# Altium PCB PCB1.PcbDoc
Units mil, origin at the board's own origin, x right, y up, seen from the top; angles counter-clockwise.
Board outline 2750 x 2490 mil, 2 copper layers (Top Layer, Bottom Layer); 35 components, 74 nets, 183 pads, 186 vias.
Unrouted connection lines stored in the file: 1.
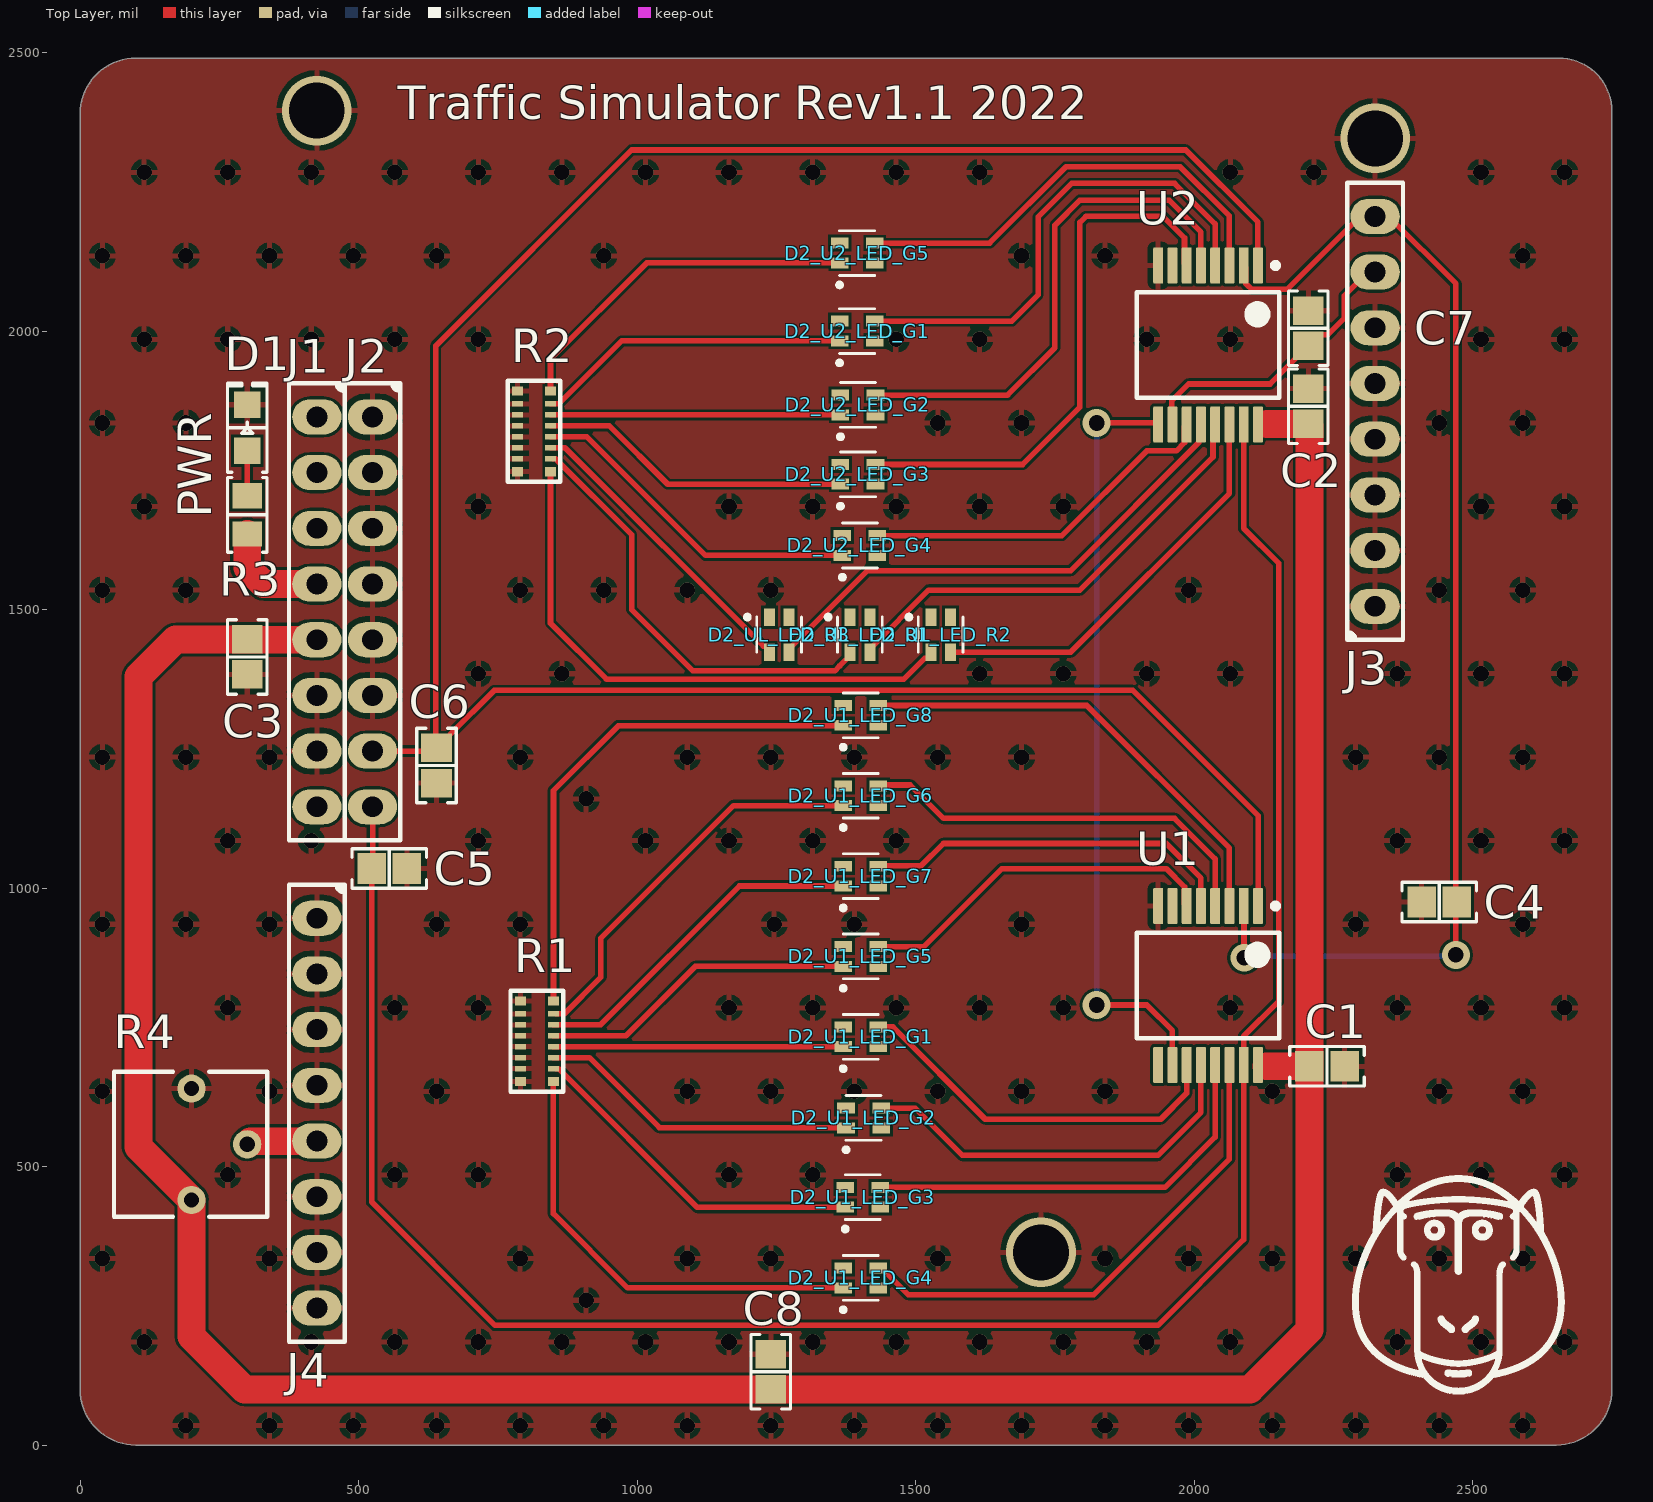
[diagram p0: Top Layer view]
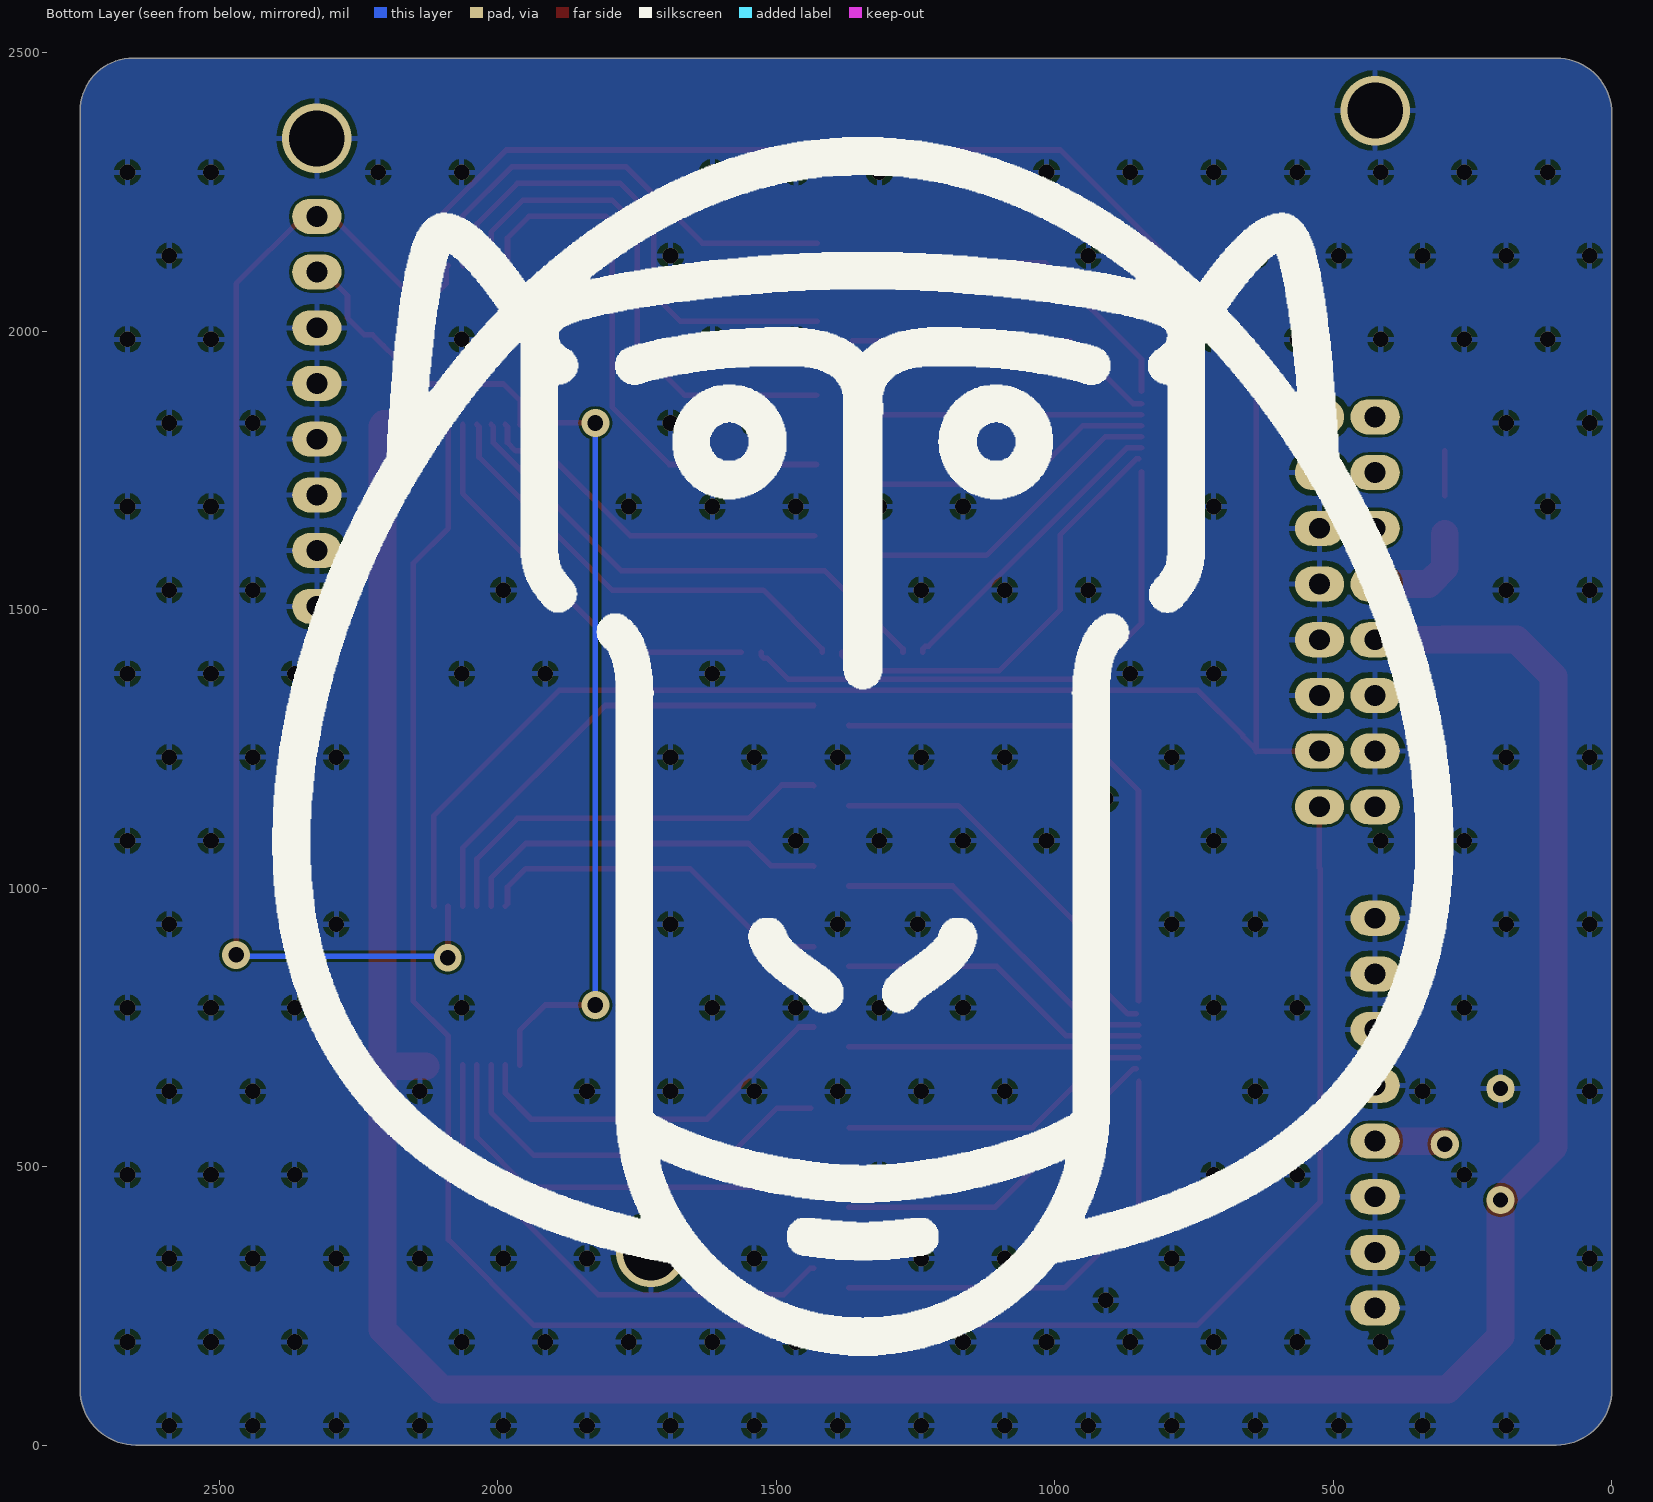
[diagram p1: Bottom Layer view, seen from below]
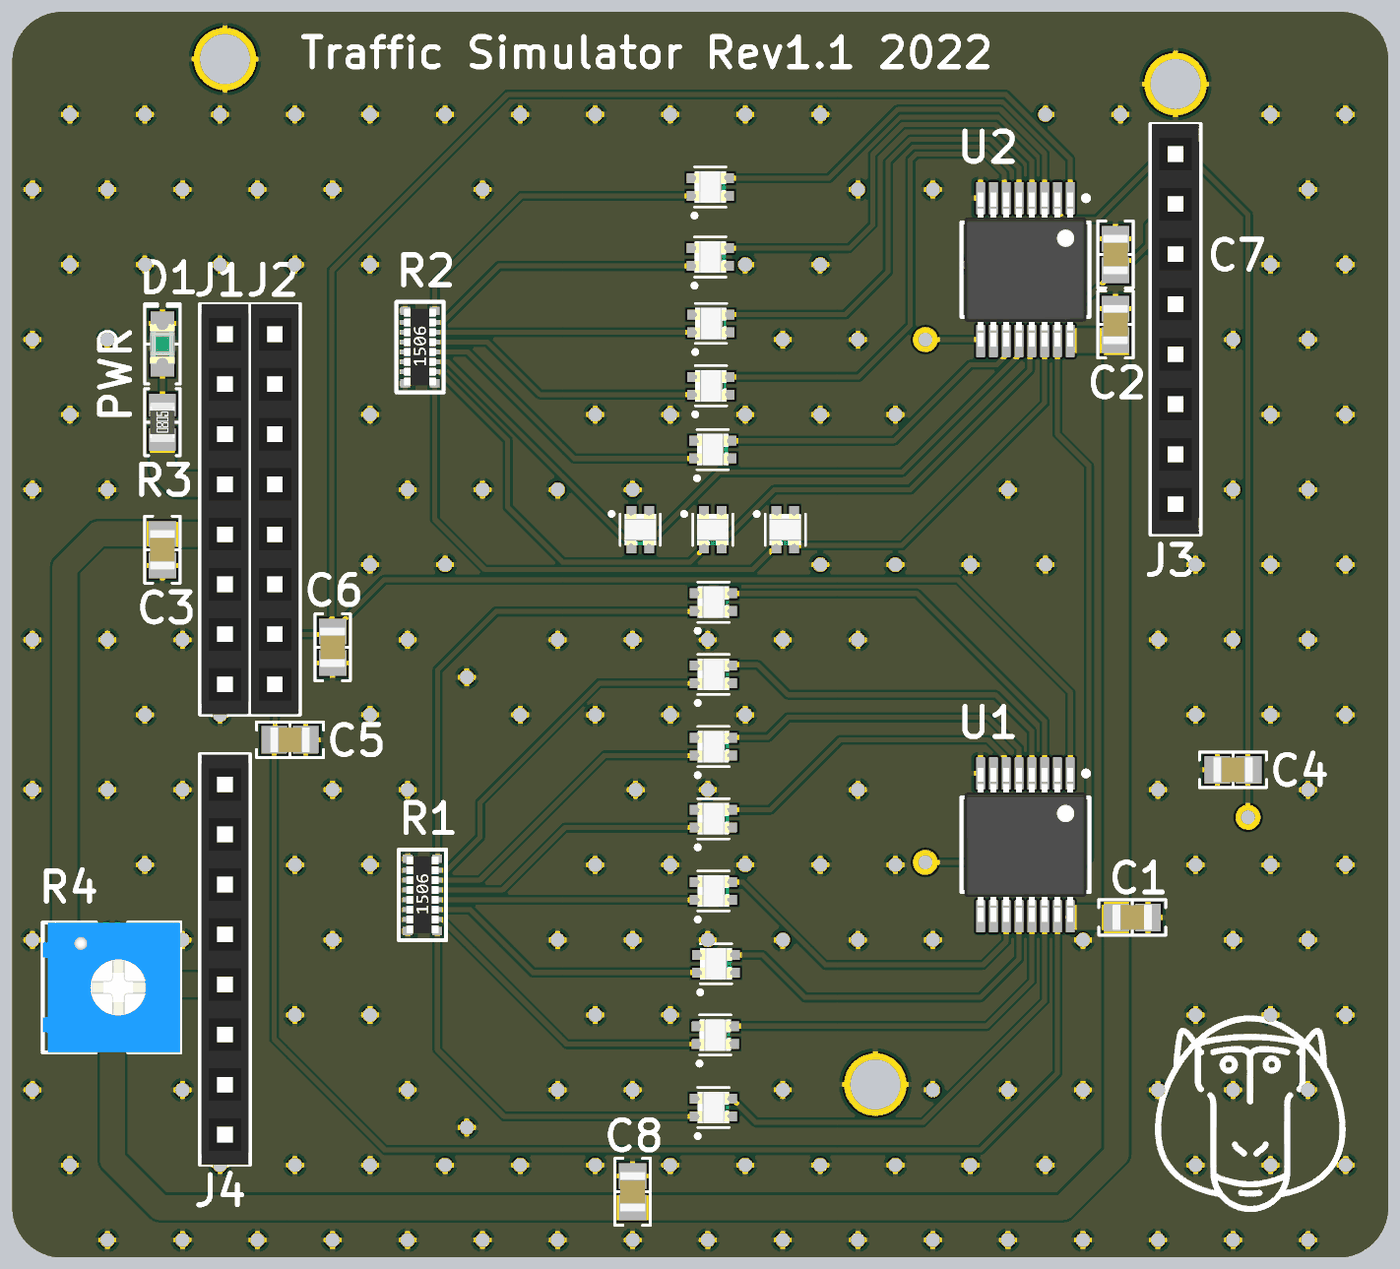
[diagram p2: 3D render of the assembled board from above, using the file's embedded part models]

## Layer stack, top to bottom
Top Solder: solder mask 0.4, Solder Resist, Dk 3.5
Top Layer: signal copper 1.4
Dielectric 1: dielectric 12.6, FR-4, Dk 4.8
Bottom Layer: signal copper 1.4
Bottom Solder: solder mask 0.4, Solder Resist, Dk 3.5

## Board outline
2650,0 ccw(c2650,100) 2750,100 2750,2395 ccw(c2655,2395) 2655,2490 100,2490 ccw(c100,2390) 0,2390 0,100 ccw(c100,100) 100,0

## Design rules (kind name [scope] priority, off if disabled: settings)
Clearance [All] p1: gap=5 ignorepadtopadclearanceinfootprint=FALSE
ComponentClearance [All] p1: gap=10 collisioncheckmode=3 verticalgap=0 showdistances=FALSE
HoleToHoleClearance [All] p1: gap=0 allowstackedmicrovias=TRUE
PolygonConnect [All] p1: connectstyle=Relief reliefconductorwidth=10 reliefentries=4 polygonreliefangle="90 Angle" airgapwidth=10
RoutingVias [All] p1: holewidth=28 width=50 viastyle="Through Hole" minholewidth=28 minwidth=50 maxholewidth=28 maxwidth=50
SilkToSilkClearance [All] p1: silktosilkclearance=0
SilkToSolderMaskClearance [IsPad] p1: minsilkscreentomaskgap=0 clearancetoexposedcopper=TRUE
SolderMaskExpansion [All] p1: expansion=4 istentingtop=FALSE
Width [All] p1: maxlimit=50 minlimit=5 preferedwidth=10 minimp=50.000000 maximp=50.000000 favimp=50.000000
26 further rules are at their usual default settings.

## Classes and differential pairs
net class U2_RED[1..3]: U2_RED1 U2_RED2 U2_RED3
net class U2_LED_R[1..3]: U2_LED_R1 U2_LED_R2 U2_LED_R3
net class U2_LED_G[1..5]: U2_LED_G1 U2_LED_G2 U2_LED_G3 U2_LED_G4 U2_LED_G5
net class U2_GREEN[1..5]: U2_GREEN1 U2_GREEN2 U2_GREEN3 U2_GREEN4 U2_GREEN5
net class U1_LED_G[1..8]: U1_LED_G1 U1_LED_G2 U1_LED_G3 U1_LED_G4 U1_LED_G5 U1_LED_G6 U1_LED_G7 U1_LED_G8
net class U1_GREEN[1..8]: U1_GREEN1 U1_GREEN2 U1_GREEN3 U1_GREEN4 U1_GREEN5 U1_GREEN6 U1_GREEN7 U1_GREEN8
component class UL_LED_R3: D2_UL_LED_R3
component class UL_LED_R2: D2_UL_LED_R2
component class UL_LED_R1: D2_UL_LED_R1
component class U2_LED_G4: D2_U2_LED_G4
component class U2_LED_G2: D2_U2_LED_G2
component class U1_LED_G7: D2_U1_LED_G7
component class U1_LED_G5: D2_U1_LED_G5
component class U1_LED_G3: D2_U1_LED_G3
component class U1_LED_G1: D2_U1_LED_G1
channel class LED: LED7 LED9 LED10 LED11 LED12 LED13 LED14 LED15 LED16 U1_LED_G2 U1_LED_G4 U1_LED_G6 U1_LED_G8 U2_LED_G1 U2_LED_G3 U2_LED_G5
component class U1_LED_G8: D2_U1_LED_G8
component class U1_LED_G6: D2_U1_LED_G6
component class U2_LED_G5: D2_U2_LED_G5
component class U1_LED_G4: D2_U1_LED_G4
component class U2_LED_G3: D2_U2_LED_G3
component class U1_LED_G2: D2_U1_LED_G2
component class U2_LED_G1: D2_U2_LED_G1
component class main: C1 C2 C3 C4 C5 C6 C7 C8 D1 J1 J2 J3 J4 R1 R2 R3 R4 U1 U2 U?

## Components (designator, comment, footprint, x,y, rotation, side; value= is the part's Value field where it differs from the comment)
C1 "1 µF" "CAP 0805_2012" 2238.5,680 r180 top
C2 "1 µF" "CAP 0805_2012" 2205,1865 r270 top
C3 "1 µF" "CAP 0805_2012" 300,1415 r90 top
C4 "1 µF" "CAP 0805_2012" 2440,975 r0 top
C5 "1 µF" "CAP 0805_2012" 555,1035 r180 top
C6 "1 µF" "CAP 0805_2012" 640,1220 r90 top
C7 "1 µF" "CAP 0805_2012" 2205,2005 r270 top
C8 "1 µF" "CAP 0805_2012" 1240,131.5 r270 top
D1 "Green" "LED 0805_2012 GREEN" 300,1826.34 r90 top
D2_U1_LED_G1 "B38G3RGB-10D0003H2U1930" LED_B38G3RGB-10D0003H2U1930 1401.5,732.86 r90 top (schematic designator D2)
D2_U1_LED_G2 "B38G3RGB-10D0003H2U1930" LED_B38G3RGB-10D0003H2U1930 1406.5,587.28 r90 top (schematic designator D2)
D2_U1_LED_G3 "B38G3RGB-10D0003H2U1930" LED_B38G3RGB-10D0003H2U1930 1405,445 r90 top (schematic designator D2)
D2_U1_LED_G4 "B38G3RGB-10D0003H2U1930" LED_B38G3RGB-10D0003H2U1930 1401.5,300 r90 top (schematic designator D2)
D2_U1_LED_G5 "B38G3RGB-10D0003H2U1930" LED_B38G3RGB-10D0003H2U1930 1401.5,877.14 r90 top (schematic designator D2)
D2_U1_LED_G6 "B38G3RGB-10D0003H2U1930" LED_B38G3RGB-10D0003H2U1930 1401.5,1165.71 r90 top (schematic designator D2)
D2_U1_LED_G7 "B38G3RGB-10D0003H2U1930" LED_B38G3RGB-10D0003H2U1930 1401.5,1021.43 r90 top (schematic designator D2)
D2_U1_LED_G8 "B38G3RGB-10D0003H2U1930" LED_B38G3RGB-10D0003H2U1930 1401.5,1310 r90 top (schematic designator D2)
D2_U2_LED_G1 "B38G3RGB-10D0003H2U1930" LED_B38G3RGB-10D0003H2U1930 1395,2000 r90 top (schematic designator D2)
D2_U2_LED_G2 "B38G3RGB-10D0003H2U1930" LED_B38G3RGB-10D0003H2U1930 1396.5,1867.28 r90 top (schematic designator D2)
D2_U2_LED_G3 "B38G3RGB-10D0003H2U1930" LED_B38G3RGB-10D0003H2U1930 1396.5,1742.72 r90 top (schematic designator D2)
D2_U2_LED_G4 "B38G3RGB-10D0003H2U1930" LED_B38G3RGB-10D0003H2U1930 1400,1615 r90 top (schematic designator D2)
D2_U2_LED_G5 "B38G3RGB-10D0003H2U1930" LED_B38G3RGB-10D0003H2U1930 1395,2140 r90 top (schematic designator D2)
D2_UL_LED_R1 "B38G3RGB-10D0003H2U1930" LED_B38G3RGB-10D0003H2U1930 1400,1455 r0 top (schematic designator D2)
D2_UL_LED_R2 "B38G3RGB-10D0003H2U1930" LED_B38G3RGB-10D0003H2U1930 1545,1455 r0 top (schematic designator D2)
D2_UL_LED_R3 "B38G3RGB-10D0003H2U1930" LED_B38G3RGB-10D0003H2U1930 1255,1455 r0 top (schematic designator D2)
J1 "SSW-108-03-T-S" "SAMTEC SSW-108-03-T-S" 425,1495.83 r270 top locked
J2 "SSW-108-03-T-S" "SAMTEC SSW-108-03-T-S" 525,1495.83 r270 top locked
J3 "SSW-108-03-T-S" "SAMTEC SSW-108-03-T-S" 2325,1855.83 r90 top locked
J4 "SSW-108-03-T-S" "SAMTEC SSW-108-03-T-S" 425,595.83 r270 top locked
R1 "EXB-2HV681JV" "RESNET 1506-16 CONVEX" 820,725 r0 top
R2 "EXB-2HV681JV" "RESNET 1506-16 CONVEX" 815,1820 r0 top
R3 "0 Ohms" "RES 0805_2012" 300,1670 r90 top
R4 "10 kOhms" "BOURNS TRIMPOT 3362P-1" 211.81,540 r270 top
U1 "SN74HC165DBR" DB0016A_N 2025,825 r270 top
U2 "3" DB0016A_N 2025,1975 r270 top

## Footprints (in the part's own frame and the unit in brackets; to place one, negate y for a bottom-side part, rotate by r counter-clockwise, add the part's x,y. Pads: shape width x height; smd on the part's side, far side on the other; paste and mask are expansions set on the pad)
"BOURNS TRIMPOT 3362P-1" [mm] "3362 -1/4 ? Square Trimpot® Trimming Potentiometer"
  round 1.29 hole 0.69: 1(-2.54,-0.3) 2(0,2.24) 3(2.54,-0.3)
  silkscreen extent -3.3,-3.84 3.3,3.15, body extent -3.3,-3.84 3.3,3.15, height 4.7
"CAP 0805_2012" [mm] "Chip Capacitor, 2-Leads, Body 2.00x1.20mm, IPC Medium Density"
  rect 1.3x1.4 smd: 1(-0.8,0) 2(0.8,0)
  silkscreen extent -1.7,-0.9 1.7,0.9, body extent -1,-0.64 1,0.64, height 1.26
DB0016A_N [mm] "SOP, 16-Leads, Body 5.6x6.5mm, Pitch 0.65mm, IPC Medium Density"
  rrect22% 1.65x0.45 smd: 1(-3.625,2.275) 2(-3.625,1.625) 3(-3.625,0.975) 4(-3.625,0.325) 5(-3.625,-0.325) 6(-3.625,-0.975) 7(-3.625,-1.625) 8(-3.625,-2.275) 9(3.625,-2.275) 10(3.625,-1.625) 11(3.625,-0.975) 12(3.625,-0.325) 13(3.625,0.325) 14(3.625,0.975) 15(3.625,1.625) 16(3.625,2.275)
  silkscreen extent -3.75,-3.25 2.4,3.25, body extent -3.91,-3.1 3.91,3.1, height 2
"LED 0805_2012 GREEN" [mm] "Chip Diode, 2-Leads, Body 2.00x1.25mm, IPC Medium Density"
  rect 1.2x1.2 smd: 1(-1.05,0) 2(1.05,0)
  silkscreen extent -2.03,-0.9 2.03,0.9, body extent -1,-0.62 1,0.63, height 0.9
LED_B38G3RGB-10D0003H2U1930 [mm]
  rect 0.5x0.8 smd: 1(-0.45,0.8) 2(0.45,0.8) 3(0.45,-0.8) 4(-0.45,-0.8)
  silkscreen extent -1.55,-0.8 1.02,0.9, body extent -0.8,-0.8 0.8,0.8, height 0.4
"RES 0805_2012" [mm] "Chip Resistor, 2-Leads, Body 2.00x1.25mm, IPC Medium Density"
  rect 1.15x1.35 smd: 1(-0.875,0) 2(0.875,0)
  silkscreen extent -1.7,-0.9 1.7,0.9, body extent -1,-0.62 1,0.63, height 0.6
"RESNET 1506-16 CONVEX" [mm] "Array Chip Resistor, 16 leads, 8 resistors, Body 3.8x1.6mm Height 0.55mm"
  rect 0.5x0.425 smd mask+0.032: 1(-0.75,1.837) 8(-0.75,-1.837) 9(0.75,-1.837) 16(0.75,1.837)
  rect 0.5x0.25 smd mask+0.032: 2(-0.75,1.25) 4(-0.75,0.25) 5(-0.75,-0.25) 6(-0.75,-0.75) 7(-0.75,-1.25) 10(0.75,-1.25) 11(0.75,-0.75) 12(0.75,-0.25) 13(0.75,0.25) 15(0.75,1.25)
  rect 0.5x0.25 smd paste+0 mask+0.032: 3(-0.75,0.75) 14(0.75,0.75)
  silkscreen extent -1.2,-2.3 1.2,2.3, body extent -0.83,-1.95 0.82,1.95, height 0.51
"SAMTEC SSW-108-03-T-S" [mm]
  oval 1.6x2.25 hole 0.95: 1(-8.89,0) 2(-6.35,0) 3(-3.81,0) 4(-1.27,0) 5(1.27,0) 6(3.81,0) 7(6.35,0) 8(8.89,0)
  silkscreen extent -10.42,-1.27 10.42,1.27, body extent -10.41,-1.21 10.41,1.21, height 8.51

## Part data
C1 C2 C3 C4 C5 C6 C7 C8: library part 885012207022, "CAP CER 1UF 10V X7R 0805", Device Package="0805 (2012 Metric)", manufacturer="Würth Elektronik", Operating Temperature="-55°C ~ 125°C", Supplier Part Number 1=732-7654-1-ND, Temperature Coefficient=X7R, Tolerance=±10%, Voltage - Rated=10V, Applications="General Purpose", Capacitance="1 µF", componentlink1description=Datasheet, componentlink1url=https://katalog.we-online.de/pbs/datasheet/885012207022.pdf, componentlink2description="DigiKey Link", componentlink2url=https://www.digikey.com/en/products/detail/würth-elektronik/885012207022/5453509, lastupdated="2022-09-19 1:04:10 PM", Lifecycle Status=Active, Minimum Order=1, Mounting Type="Surface Mount, MLCC", Package / Case="0805 (2012 Metric)", packaging=TapeAndReel, Part Number=885012207022, Part Status=Active, partid=9332, price=0.06, series=WCAP-CSGP, Size / Dimension="0.079\" L x 0.049\" W (2.00mm x 1.25mm)", Supplier 1=DigiKey, Thickness (Max)="0.053\" (1.35mm)"
D1: library part XZVG54W-1, "LED GREEN CLEAR CHIP SMD", Current - Test=20mA, Device Package="0805 (2012 Metric)", Lens Color=Colorless, manufacturer=SunLED, Millicandela Rating=49mcd, Supplier Device Package="Chip LED", Supplier Part Number 1=1497-1216-1-ND, Voltage - Forward (Vf) (Typ)=2.1V, Color=Green, componentlink1description=Datasheet, componentlink1url=https://www.sunledusa.com/products/spec/XZVG54W-1.pdf, componentlink2description="DigiKey Link", componentlink2url=https://www.digikey.com/en/products/detail/sunled/XZVG54W-1/4745972, Configuration=Standard, Height (Max)=0.85mm, lastupdated="2022-09-14 8:37:01 AM", Lens Size="1.20mm x 1.25mm", Lens Style="Rectangle with Flat Top", Lens Transparency=Clear, Lifecycle Status=Active, Minimum Order=1, Mounting Type="Surface Mount", Package / Case="0805 (2012 Metric)", packaging=TapeAndReel, Part Number=XZVG54W-1, Part Status=Active, partid=267, price=0.05, series=-, Size / Dimension="2.00mm L x 1.25mm W", Supplier 1=DigiKey, Viewing Angle=120°, Wavelength - Dominant=570nm, Wavelength - Peak=574nm
D2_U1_LED_G1 D2_U1_LED_G2 D2_U1_LED_G3 D2_U1_LED_G4 D2_U1_LED_G5 D2_U1_LED_G6 D2_U1_LED_G7 D2_U1_LED_G8 D2_U2_LED_G1 D2_U2_LED_G2 D2_U2_LED_G3 D2_U2_LED_G4 D2_U2_LED_G5 D2_UL_LED_R1 D2_UL_LED_R2 D2_UL_LED_R3: "Red, Green, Blue (RGB) - LED Indication - Discrete 2V Red, 3V Green, 3V Blue 0606 (1616 Metric)", Package=None, Availability="In Stock", Check_prices=https://www.snapeda.com/parts/B38G3RGB-10D0003H2U1930/Harvatek/view-part/?ref=eda, MF="Harvatek Corporation", MP=B38G3RGB-10D0003H2U1930, price=None, Purchase-URL=https://pricing.snapeda.com/search/part/B38G3RGB-10D0003H2U1930/?ref=eda, SnapEDA_Link=https://www.snapeda.com/parts/B38G3RGB-10D0003H2U1930/Harvatek/view-part/?ref=snap
J1 J2 J3 J4: "CONN RCPT 8POS 0.1 TIN PCB", Current Rating (Amps)="5.7A per Contact", Insulation Color=Black, manufacturer="Samtec Inc.", Material Flammability Rating="UL94 V-0", Operating Temperature="-55°C ~ 105°C", Supplier Part Number 1=SAM8866-ND, componentlink1description=Datasheet, componentlink1url=http://suddendocs.samtec.com/catalog_english/ssw_th.pdf, componentlink2description="DigiKey Link", componentlink2url=https://www.digikey.com/en/products/detail/samtec-inc/SSW-108-03-T-S/1790200, Connector Type=Receptacle, Contact Finish - Mating=Tin, Contact Finish - Post=Tin, Contact Length - Post="0.394\" (10.00mm)", Contact Type=Forked, Fastening Type=Push-Pull, Insulation Height="0.335\" (8.51mm)", lastupdated="2022-06-21 3:09:52 PM", Lifecycle Status=Active, Minimum Order=1, Mounting Type="Through Hole", Number of Positions=8, Number of Positions Loaded=All, Number of Rows=1, packaging=Bulk, Part Number=SSW-108-03-T-S, Part Status=Active, Pitch - Mating="0.100\" (2.54mm)", price=0.73, series=SSW, Style="Board to Board or Cable", Supplier 1=DigiKey, Termination=Solder
R1 R2: "RES ARRAY 8 RES 680 OHM 1506", manufacturer="Panasonic Electronic Components", Number of Resistors=8, Operating Temperature="-55°C ~ 125°C", Package / Case="1506, Convex, Long Side Terminals", Power Per Element=62.5mW, Resistance (Ohms)=680, Supplier Device Package=1506, Supplier Part Number 1=Y1681CT-ND, Temperature Coefficient=±200ppm/°C, Tolerance=±5%, Applications="Automotive AEC-Q200", Circuit Type=Isolated, componentlink1description=Datasheet, componentlink1url=https://industrial.panasonic.com/cdbs/www-data/pdf/AOC0000/AOC0000C14.pdf, componentlink2description="DigiKey Link", componentlink2url=https://www.digikey.com/en/products/detail/panasonic-electronic-components/EXB-2HV681JV/285317, Height - Seated (Max)="0.022\" (0.55mm)", lastupdated="2022-09-14 8:40:22 AM", Lifecycle Status=Active, Minimum Order=1, Mounting Type="Surface Mount", Number of Pins=16, packaging=TapeAndReel, Part Number=EXB-2HV681JV, Part Status=Active, partid=684, price=0.03, series=EXB, Size / Dimension="0.150\" L x 0.063\" W (3.80mm x 1.60mm)", Supplier 1=DigiKey
R3: library part CR0805AJ/-000EAS, "RESA-AS 0805 0R JUMPER 125MW", Device Package="0805 (2012 Metric)", manufacturer="Bourns Inc.", Operating Temperature="-55°C ~ 155°C", Power (Watts)="0.125W, 1/8W", Ratings=AEC-Q200, Supplier Device Package=0805, Supplier Part Number 1=CR0805AJ/-000EASCT-ND, Tolerance=Jumper, componentlink1description=Datasheet, componentlink1url=//media.digikey.com/pdf/Data%20Sheets/Bourns%20PDFs/CRyyyyA-AS_Model_DS.pdf, componentlink2description="DigiKey Link", componentlink2url=https://www.digikey.com/en/products/detail/bourns-inc/CR0805AJ-000EAS/10240129, Composition="Thick Film", Features="Anti-Sulfur, Automotive AEC-Q200, Moisture Resistant", Height - Seated (Max)="0.024\" (0.60mm)", lastupdated="2022-09-14 8:22:37 AM", Lifecycle Status=Active, Minimum Order=1, Number of Terminations=2, Package / Case="0805 (2012 Metric)", packaging=TapeAndReel, Part Number=CR0805AJ/-000EAS, Part Status=Active, partid=49707, price=0.01, Resistance="0 Ohms", series=CR0805A-AS, Size / Dimension="0.079\" L x 0.049\" W (2.00mm x 1.25mm)", Supplier 1=DigiKey
R4: library part 3362P-1-103LF, "TRIMMER 10K OHM 0.5W PC PIN TOP", manufacturer="Bourns Inc.", Power (Watts)="0.5W, 1/2W", Resistive Material=Cermet, Supplier Part Number 1=3362P-103LF-ND, Temperature Coefficient=±100ppm/°C, Tolerance=±10%, Adjustment Type="Top Adjustment", componentlink1description=Datasheet, componentlink1url=https://www.bourns.com/docs/Product-Datasheets/3362.pdf, componentlink2description="DigiKey Link", componentlink2url=https://www.digikey.com/en/products/detail/bourns-inc/3362P-1-103LF/1088412, lastupdated="2022-09-14 8:53:23 AM", Lifecycle Status=Active, Minimum Order=1, Mounting Type="Through Hole", Number of Turns=1, packaging=Tube, Part Number=3362P-1-103LF, Part Status=Active, partid=136, price=0.46, Resistance="10 kOhms", series="Trimpot® 3362 - Sealed", Size / Dimension="Rectangular - 0.275\" x 0.260\" Face (6.99mm x 6.60mm)", Supplier 1=DigiKey, Termination Style="PC Pins"
U1 U2: library part CMP-0780-00071-3, "8-Bit Parallel-Load Shift Registers, DB0016A, LARGE T&R", F @ Nom Voltage(Max)(Mhz)=28, Generic Part Number=SN74HC165, ICC @ Nom Voltage(Max)(mA)=0.08, manufacturer="Texas Instruments", Operating Temperature Range(C)="-40 to 125", Rating=Catalog, tpd @ Nom Voltage(Max)(ns)=38, Voltage(Nom)(V)=6, 3-State Output=No, Bits=8, Code_JEDEC=MO-150, DatasheetVersion=SCLS116G, Input Type=CMOS, Output Drive (IOL/IOH)(Max)(mA)=5.2/-5.2, Output Type=CMOS, PackageReference=DB0016A, PackageVersion=http://www.ti.com/lit/ml/mpds507/mpds507.pdf, Technology Family=HC, VCC(Max)(V)=6, VCC(Min)(V)=2

## Via types
v1: diameter 28, hole 28, Top Layer to Bottom Layer, 179 vias
v2: diameter 50, hole 28, Top Layer to Bottom Layer, 4 vias
v3: diameter 125, hole 100, Top Layer to Bottom Layer, 3 vias

## Nets (pads, with @x,y where several pads share a name; then routed paths per layer and width w, separated by ;. In a path a pad name is that pad's centre, name@x,y a point inside that pad or via, vN(x,y) a via of type N, cw(c..) or ccw(c..) an arc to the next point about the centre after c; other vN are vias at no path point)
5V: C1.2 C2.2 C3.2 C8.2 J1.5 R4.3 U1.16 U2.16 | length 5439.1
  Top Layer w50: J1.5 302.64,1445.83 301.97,1446.5 C3.2 171.5,1446.5 105,1380 105,535 R4.3 200,195 295,100 C8.2 2100,100 2207.01,207.01 C1.2 ; 2130,680 C1.2 ; 2130.71,1832.91 2204.41,1832.91 C2.2 ; C2.2@2205,1830 2206.42,1830 2207.01,1829.41 C1.2
En: C5.2 J2.8 U1.15 U2.15 | length 3946.5
  Top Layer w10: J2.8 525,1036.5 C5.2 523.5,436.5 745,215 1935,215 2088.98,368.98 U1.15 2088.98,733.98 2152.01,797.01 2152.01,1582.99 2088.98,1646.02 U2.15
GND: C1.1 C2.1 C3.1 C4.1 C5.1 C6.1 C7.1 C8.1 D1.2 J1.6 J1.7 J2.1 J2.2 J2.3 J2.4 J2.5 J2.6 J3.1 J3.2 J3.3 J3.4 J3.5 J3.6 J4.1 J4.2 J4.3 J4.4 J4.6 J4.7 J4.8 R1.1 R1.2 R1.3 R1.4 R1.5 R1.6 R1.7 R1.8 R2.1 R2.2 R2.3 R2.4 R2.5 R2.6 R2.7 R2.8 R4.1 U1.8 U2.8
  other v1: 190,35 340,35 490,35 640,35 790,35 940,35 1090,35 1240,35 1390,35 1540,35 1690,35 1840,35 1990,35 2140,35 2290,35 2440,35 2590,35 115,185 415,185 565,185 715,185 865,185 1015,185 1165,185 1315,185 1465,185 1615,185 1765,185 1915,185 2065,185 2365,185 2515,185 2665,185 908.5,260 40,335 340,335 790,335 1090,335 1240,335 1540,335 1840,335 1990,335 2140,335 2290,335 2440,335 2590,335 265,485 565,485 715,485 1165,485 1315,485 2365,485 2515,485 2665,485 40,635 340,635 640,635 1090,635 1240,635 1390,635 1540,635 1690,635 1840,635 2140,635 2440,635 2590,635 265,785 565,785 715,785 1165,785 1315,785 1465,785 1615,785 1765,785 2065,785 2365,785 2515,785 2665,785 40,935 190,935 340,935 640,935 790,935 1246,935 1390,935 1690,935 2290,935 2590,935 265,1085 415,1085 715,1085 1015,1085 1165,1085 1315,1085 1465,1085 2365,1085 2515,1085 2665,1085 908.5,1160 40,1235 190,1235 340,1235 790,1235 1090,1235 1240,1235 1390,1235 1540,1235 1690,1235 2290,1235 2440,1235 2590,1235 715,1385 865,1385 1615,1385 1765,1385 1915,1385 2065,1385 2365,1385 2515,1385 2665,1385 40,1535 190,1535 790,1535 940,1535 1090,1535 1240,1535 1990,1535 2440,1535 2590,1535 115,1685 715,1685 1165,1685 1315,1685 1465,1685 1615,1685 1765,1685 2515,1685 2665,1685 40,1835 190,1835 1540,1835 1690,1835 2440,1835 2590,1835 115,1985 265,1985 415,1985 565,1985 715,1985 1465,1985 1615,1985 1915,1985 2065,1985 2515,1985 2665,1985 40,2135 190,2135 340,2135 490,2135 640,2135 940,2135 1690,2135 1840,2135 2590,2135 115,2285 265,2285 415,2285 565,2285 715,2285 865,2285 1015,2285 1165,2285 1315,2285 1465,2285 1615,2285 2065,2285 2215,2285 2515,2285 2665,2285
  other v3: 1725,345.83 2325,2345.83 425,2395.83
LED_PWR: J1.4 R3.1 | length 197.6
  Top Layer w50: R3.1 300,1575.12 329.29,1545.83 J1.4
NetD1_1: D1.1 R3.2 | length 80.6
  Top Layer w10: R3.2 D1.1
NetD2_U1_LED_G1_2: D2_U1_LED_G1.2
NetD2_U1_LED_G1_4: D2_U1_LED_G1.4
NetD2_U1_LED_G2_2: D2_U1_LED_G2.2
NetD2_U1_LED_G2_4: D2_U1_LED_G2.4
NetD2_U1_LED_G3_2: D2_U1_LED_G3.2
NetD2_U1_LED_G3_4: D2_U1_LED_G3.4
NetD2_U1_LED_G4_2: D2_U1_LED_G4.2
NetD2_U1_LED_G4_4: D2_U1_LED_G4.4
NetD2_U1_LED_G5_2: D2_U1_LED_G5.2
NetD2_U1_LED_G5_4: D2_U1_LED_G5.4
NetD2_U1_LED_G6_2: D2_U1_LED_G6.2
NetD2_U1_LED_G6_4: D2_U1_LED_G6.4
NetD2_U1_LED_G7_2: D2_U1_LED_G7.2
NetD2_U1_LED_G7_4: D2_U1_LED_G7.4
NetD2_U1_LED_G8_2: D2_U1_LED_G8.2
NetD2_U1_LED_G8_4: D2_U1_LED_G8.4
NetD2_U2_LED_G1_2: D2_U2_LED_G1.2
NetD2_U2_LED_G1_4: D2_U2_LED_G1.4
NetD2_U2_LED_G2_2: D2_U2_LED_G2.2
NetD2_U2_LED_G2_4: D2_U2_LED_G2.4
NetD2_U2_LED_G3_2: D2_U2_LED_G3.2
NetD2_U2_LED_G3_4: D2_U2_LED_G3.4
NetD2_U2_LED_G4_2: D2_U2_LED_G4.2
NetD2_U2_LED_G4_4: D2_U2_LED_G4.4
NetD2_U2_LED_G5_2: D2_U2_LED_G5.2
NetD2_U2_LED_G5_4: D2_U2_LED_G5.4
NetD2_UL_LED_R1_1: D2_UL_LED_R1.1
NetD2_UL_LED_R1_2: D2_UL_LED_R1.2
NetD2_UL_LED_R2_1: D2_UL_LED_R2.1
NetD2_UL_LED_R2_2: D2_UL_LED_R2.2
NetD2_UL_LED_R3_1: D2_UL_LED_R3.1
NetD2_UL_LED_R3_2: D2_UL_LED_R3.2
SCL: C4.2 J3.8 U1.2 U2.2 | length 2199.8
  Top Layer w10: U1.2 2089.49,967.2 2089.49,875.51 v2(2090,875) ; U2.2 2092.83,2113.86 2092.83,2085.12 2095.71,2082.24 2102.71,2075.24 2167.27,2075.24 2297.87,2205.83 2349.17,2205.83 2470,2085 2470,975 v2(2470,880)
  Bottom Layer w10: v2(2090,875) 2092.5,877.5 2467.5,877.5 v2(2470,880)
SDA: C7.2 J3.7 U2.10 | length 527.2
  Top Layer w10: U2.10 1960,1833.31 1960,1875 1990,1905 2136.5,1905 2186.5,1955 C7.2 2224.71,1993.22 2239.65,1993.22 2270,2023.57 2270,2063.62 2312.2,2105.83 J3.7
Shft/L\d\: C6.2 J2.7 U1.1 U2.1 | length 4370.7
  Top Layer w10: J2.7 637.68,1245.83 638.5,1245 638.5,1251.5 638.5,1973.5 990,2325 1985,2325 2114.57,2195.43 U2.1 U2.1@2114.78,2117.5 ; C6.2 641.97,1251.5 662.56,1272.09 662.56,1274.06 743.5,1355 1890,1355 2115,1130 2115,968.15 U1.1 ; 2114.78,2025.22 2115,2025
"Traffic Control": J4.5 R4.2 | length 131.5
  Top Layer w10: R4.2 R4.2@302.91,542.91
  Top Layer w50: R4.2 300.21,540 305.71,545.5 424.67,545.5 J4.5
U1_GREEN1: D2_U1_LED_G1.1 R1.12 | length 520.5
  Top Layer w10: R1.12 1059.53,715.16 D2_U1_LED_G1.1
U1_GREEN2: D2_U1_LED_G2.1 R1.11 | length 571.6
  Top Layer w10: R1.11 914.53,695.47 1040,570 D2_U1_LED_G2.1@1369.15,570
U1_GREEN3: D2_U1_LED_G3.1 R1.10 | length 618.8
  Top Layer w10: R1.10@854.37,675.71 858.83,675.71 1107.97,426.57 D2_U1_LED_G3.1@1370,426.57
U1_GREEN4: D2_U1_LED_G4.1 R1.9 | length 812.8
  Top Layer w10: R1.9 849.53,415.47 982.72,282.28 D2_U1_LED_G4.1
U1_GREEN5: D2_U1_LED_G5.1 R1.13 | length 572.1
  Top Layer w10: R1.13 979.84,734.84 1104.43,859.43 D2_U1_LED_G5.1
U1_GREEN6: D2_U1_LED_G6.1 R1.15 | length 711.4
  Top Layer w10: R1.15@854.37,774.29 869.29,774.29 935,840 935,910 1173,1148 D2_U1_LED_G6.1
U1_GREEN7: D2_U1_LED_G7.1 R1.14 | length 623.7
  Top Layer w10: R1.14 934.53,754.53 1183.71,1003.71 D2_U1_LED_G7.1
U1_GREEN8: D2_U1_LED_G8.1 R1.16 | length 946.4
  Top Layer w10: R1.16 849.85,797.67 849.85,1174.85 966.45,1291.45 1369.16,1291.45 D2_U1_LED_G8.1
U1_LED_G1: D2_U1_LED_G1.3 U1.11 | length 692.2
  Top Layer w10: D2_U1_LED_G1.3 1459.43,750.57 1625,585 1940,585 1986.61,631.61 U1.11
U1_LED_G2: D2_U1_LED_G2.3 U1.12 | length 726.5
  Top Layer w10: D2_U1_LED_G2.3 1499.04,605 1584.04,520 1935,520 2012.2,597.2 U1.12
U1_LED_G3: D2_U1_LED_G3.3 U1.13 | length 768.1
  Top Layer w10: D2_U1_LED_G3.3 1947.72,462.72 2037.8,552.8 U1.13
U1_LED_G4: D2_U1_LED_G4.3 U1.14 | length 919.9
  Top Layer w10: D2_U1_LED_G4.3 1438.9,317.72 1486.61,270 1820,270 2063.39,513.39 U1.14
U1_LED_G5: D2_U1_LED_G5.3 U1.6 | length 657.5
  Top Layer w10: D2_U1_LED_G5.3 1514.86,894.86 1655,1035 1950,1035 1982.76,1002.24 1982.76,971.57 U1.6
U1_LED_G6: D2_U1_LED_G6.3 U1.4 | length 744.9
  Top Layer w10: D2_U1_LED_G6.3 1434.56,1185 1490,1185 1550,1125 1965,1125 2037.8,1052.2 U1.4
U1_LED_G7: D2_U1_LED_G7.3 U1.5 | length 672
  Top Layer w10: D2_U1_LED_G7.3 1433.85,1040 1510,1040 1550,1080 1950,1080 2012.2,1017.8 U1.5
U1_LED_G8: D2_U1_LED_G8.3 U1.3 | length 840.4
  Top Layer w10: D2_U1_LED_G8.3 1807.28,1327.72 2063.39,1071.61 U1.3
U2_GREEN1: D2_U2_LED_G1.1 R2.15 | length 565.8
  Top Layer w10: R2.15 859.21,1869.21 972.28,1982.28 D2_U2_LED_G1.1
U2_GREEN2: D2_U2_LED_G2.1 R2.14 | length 520.5
  Top Layer w10: R2.14 D2_U2_LED_G2.1@1364.98,1849.55
U2_GREEN3: D2_U2_LED_G3.1 R2.13 | length 563.9
  Top Layer w10: R2.13 950.16,1829.84 1055,1725 D2_U2_LED_G3.1
U2_GREEN4: D2_U2_LED_G4.1 R2.12 | length 612.2
  Top Layer w10: R2.12 909.84,1810.16 1122.72,1597.28 D2_U2_LED_G4.1
U2_GREEN5: D2_U2_LED_G5.1 R2.16 | length 647.7
  Top Layer w10: R2.16 844.53,1949.53 1017.28,2122.28 D2_U2_LED_G5.1
U2_LED_G1: D2_U2_LED_G1.3 U2.4 | length 900.4
  Top Layer w10: D2_U2_LED_G1.3 1672.72,2017.72 1720,2065 1720,2205 1780,2265 1965,2265 2037.8,2192.2 U2.4
U2_LED_G2: D2_U2_LED_G2.3 U2.5 | length 941.8
  Top Layer w10: D2_U2_LED_G2.3 1665,1885 1750,1970 1750,2190 1795,2235 1955,2235 2012.2,2177.8 U2.5
U2_LED_G3: D2_U2_LED_G3.3 U2.6 | length 1000.7
  Top Layer w10: D2_U2_LED_G3.3 1692.15,1760.43 1795,1863.28 1795,2195 1805.86,2205.86 1944.14,2205.86 1982.76,2167.24 1982.76,2121.57 U2.6
U2_LED_G4: D2_U2_LED_G4.3 U2.11 | length 654.6
  Top Layer w10: D2_U2_LED_G4.3 1762.72,1632.72 1915,1785 1968.08,1785 1982.76,1799.68 1982.76,1828.43 U2.11
U2_LED_G5: D2_U2_LED_G5.3 U2.3 | length 819.3
  Top Layer w10: D2_U2_LED_G5.3 1632.72,2157.72 1770,2295 1975,2295 2063.39,2206.61 U2.3
U2_LED_R1: D2_UL_LED_R1.3 U2.13 | length 824.8
  Top Layer w10: D2_UL_LED_R1.3 1417.72,1429.41 1523.31,1535 1795,1535 2033.94,1773.94 2033.94,1828.43 U2.13
U2_LED_R2: D2_UL_LED_R2.3 U2.14 | length 742.6
  Top Layer w10: D2_UL_LED_R2.3 1778.5,1423.5 2063.39,1708.39 U2.14
U2_LED_R3: D2_UL_LED_R3.3 U2.12 | length 929.1
  Top Layer w10: D2_UL_LED_R3.3 1272.72,1429.41 1413.31,1570 1778.67,1570 2008.35,1799.68 2008.35,1828.43 U2.12
U2_Output: U1.10 U2.9 | length 1373.3
  Top Layer w10: v2(1825,790) 1915,790 1961.02,743.98 U1.10 ; v2(1825,1835) 1932.72,1835 U2.9
  Bottom Layer w10: v2(1825,790) v2(1825,1835)
U2_RED1: D2_UL_LED_R1.4 R2.10 | length 786.9
  Top Layer w10: R2.10@849.37,1770.71 853.83,1770.71 990,1634.54 990,1500 1100,1390 1355,1390 1363.3,1398.3 1363.3,1398.61 1382.28,1417.6 D2_UL_LED_R1.4
U2_RED2: D2_UL_LED_R2.4 R2.9 | length 1020.1
  Top Layer w10: R2.9 844.53,1475.47 945,1375 1478.78,1375 1516.54,1412.76 1522.44,1412.76 1527.28,1417.6 D2_UL_LED_R2.4
U2_RED3: D2_UL_LED_R3.4 R2.11 | length 548.2
  Top Layer w10: R2.11 870.32,1790.47 1226.54,1434.25 1232.44,1434.25 1237.28,1429.41 D2_UL_LED_R3.4
pads on no net: J1.1 J1.2 J1.3 J1.8 U1.7 U1.9 U2.7

## Polygon pours and split planes (outlines as drawn)
GND on Bottom Layer "GND" (solid, pour order 1): 2650,0 ccw(c2650,100) 2750,100 2750,2395 ccw(c2655,2395) 2655,2490 100,2490 ccw(c100,2390) 0,2390 0,100 ccw(c100,100) 100,0
GND on Top Layer "GND" (solid, pour order 0): 2650,0 ccw(c2650,100) 2750,100 2750,2395 ccw(c2655,2395) 2655,2490 100,2490 ccw(c100,2390) 0,2390 0,100 ccw(c100,100) 100,0

## Silkscreen, mask and mechanical layers (free items; w line width, h text height)
Top Overlay:
  drawing of 7 lines, arcs and shapes, not listed
  text "Traffic Simulator Rev1.1 2022" at 570,2380 h60
  text "PWR" at 235,1665 h60 r90
Bottom Overlay:
  drawing of 7 lines, arcs and shapes, not listed
Mechanical 1:
  lines w10: 0,90 ccw(c72.43,90) 21.21,38.79 30,30 ccw(c102.43,102.43) 102.43,0 2647.57,0 ccw(c2647.57,102.43) 2720,30 ccw(c2647.57,102.43) 2750,102.43 2750,2375 2750,2401.72 ccw(c2681.72,2401.72) 2730,2450 2707.68,2472.32 ccw(c2665,2429.64) 2665,2490 2620,2490 110,2490 ccw(c110,2369.29) 24.64,2454.64 21.21,2451.21 ccw(c72.43,2400) 0,2400 0,90
  text "Ignore Rule Error on J1 and J2" at 2795,2359.99 h60